# Altium PCB STM32F302VC_EVM.PcbDoc (part 7 of 19)
Units mil, origin at the board's own origin, x right, y up, seen from the top; angles counter-clockwise.
Board outline 3937.01 x 3937.01 mil, 2 copper layers (Top Layer, Bottom Layer); 117 components, 166 nets, 602 pads, 373 vias.
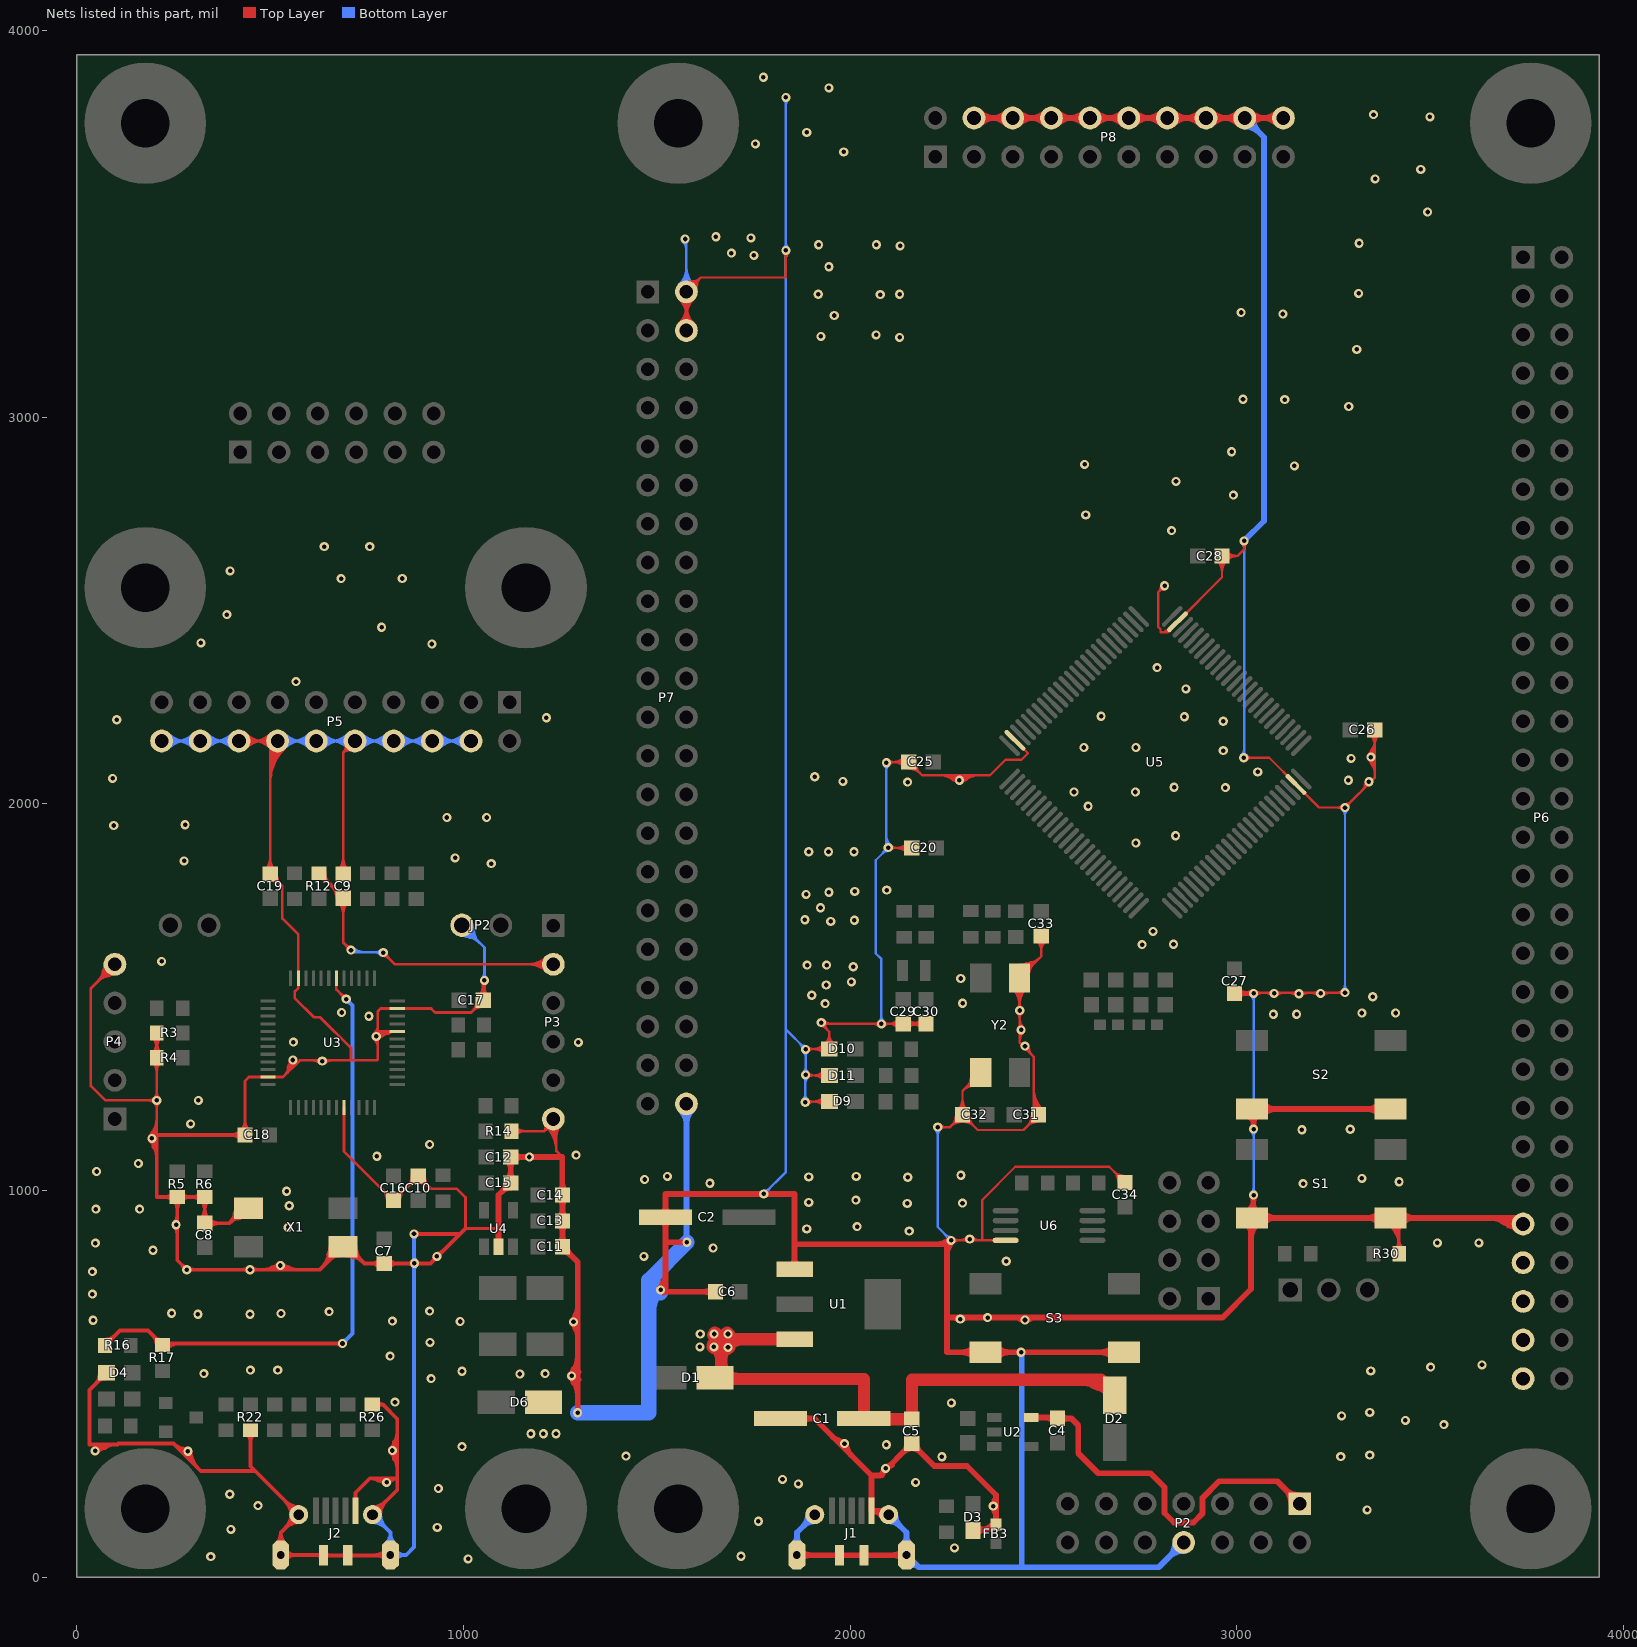
[diagram p7: the nets of this part, all layers, seen from the top]

## Via types
v1: diameter 23.62, hole 11.81, Top Layer to Bottom Layer, tented both sides, 372 vias
v2: diameter 50, hole 28, Top Layer to Bottom Layer, tented both sides, 1 vias

## Nets (pads, with @x,y where several pads share a name; then routed paths per layer and width w, separated by ;. In a path a pad name is that pad's centre, name@x,y a point inside that pad or via, vN(x,y) a via of type N, cw(c..) or ccw(c..) an arc to the next point about the centre after c; other vN are vias at no path point) (continued)
GND: (continued)
  Bottom Layer w6: P7.2@1576.38,3324.02 v1@1576.38,3460.63 ; v1(1776.57,991.14) 1833.66,1048.23 1833.66,1439.77 ; v1(1833.66,3826.77) v1(1833.66,3431.1) 1833.66,1439.77 ; v1(1883.86,1228.35) 1883.86,1298.15 v1(1884.84,1299.13) v1(1884.84,1365.16) 1833.66,1416.34 1833.66,1439.77 ; v1(2080.71,1431.1) 2080.71,1598.43 2065.94,1613.2 2065.94,1854.32 v1(2098.43,1886.81) ; v1@2093.5,1891.73 v1(2093.5,2106.3) ; v1(2226.38,1163.92) 2226.38,905.51 v1(2260.83,871.06) ; v1(3017.72,2119.09) 3018.7,2120.08 v1(3018.7,2680.12) ; v1(3043.31,988.19) v1(3043.31,1158.95) v1(3043.31,1509.84) ; v1(3279.53,1511.81) v1(3279.53,1990.28) ; P7.2@1557.62,3342.77 ccw(c1512.33,3388.06) 1576.38,3388.06 ; P7.2@1557.62,3342.77 ccw(c1512.33,3388.06) 1576.38,3388.06 ; P7.2@1557.62,3342.77 ccw(c1512.33,3388.06) 1576.38,3388.06 ; P7.2@1561.86,3338.53 ccw(c1526.82,3373.57) 1576.38,3373.57 ; P7.2@1561.86,3338.53 ccw(c1526.82,3373.57) 1576.38,3373.57 ; P7.2@1561.86,3338.53 ccw(c1526.82,3373.57) 1576.38,3373.57 ; P7.2@1566.11,3334.29 ccw(c1541.31,3359.09) 1576.38,3359.09 ; P7.2@1566.11,3334.29 ccw(c1541.31,3359.09) 1576.38,3359.09 ; P7.2@1566.11,3334.29 ccw(c1541.31,3359.09) 1576.38,3359.09 ; v1@1566.83,3454.4 cw(c1543.8,3431.36) 1576.38,3431.36 ; v1@1566.83,3454.4 cw(c1543.8,3431.36) 1576.38,3431.36 ; v1@1566.83,3454.4 cw(c1543.8,3431.36) 1576.38,3431.36 ; v1@1571.08,3458.64 cw(c1558.28,3445.85) 1576.38,3445.85 ; v1@1571.08,3458.64 cw(c1558.28,3445.85) 1576.38,3445.85 ; v1@1571.08,3458.64 cw(c1558.28,3445.85) 1576.38,3445.85 ; 1576.38,3359.09 ccw(c1611.45,3359.09) P7.2@1586.65,3334.29 ; 1576.38,3359.09 ccw(c1611.45,3359.09) P7.2@1586.65,3334.29 ; 1576.38,3359.09 ccw(c1611.45,3359.09) P7.2@1586.65,3334.29 ; 1576.38,3373.57 ccw(c1625.94,3373.57) P7.2@1590.89,3338.53 ; 1576.38,3373.57 ccw(c1625.94,3373.57) P7.2@1590.89,3338.53 ; 1576.38,3373.57 ccw(c1625.94,3373.57) P7.2@1590.89,3338.53 ; 1576.38,3388.06 ccw(c1640.42,3388.06) P7.2@1595.14,3342.77 ; 1576.38,3388.06 ccw(c1640.42,3388.06) P7.2@1595.14,3342.77 ; 1576.38,3388.06 ccw(c1640.42,3388.06) P7.2@1595.14,3342.77 ; 1576.38,3447.36 cw(c1586.34,3447.36) v1@1579.3,3454.4 ; 1576.38,3447.36 cw(c1586.34,3447.36) v1@1579.3,3454.4 ; 1576.38,3447.36 cw(c1586.34,3447.36) v1@1579.3,3454.4 ; v1@1776.57,999.95 ccw(c1776.57,1021.22) 1791.62,1006.18 ; v1@1776.57,999.95 ccw(c1776.57,1021.22) 1791.62,1006.18 ; v1@1776.57,999.95 ccw(c1776.57,1021.22) 1791.62,1006.18 ; v1@1785.39,991.14 cw(c1806.66,991.14) 1791.62,1006.18 ; v1@1785.39,991.14 cw(c1806.66,991.14) 1791.62,1006.18 ; v1@1785.39,991.14 cw(c1806.66,991.14) 1791.62,1006.18 ; v1@1827.43,3424.87 cw(c1812.39,3409.83) 1833.66,3409.83 ; v1@1827.43,3424.87 cw(c1812.39,3409.83) 1833.66,3409.83 ; v1@1827.43,3424.87 cw(c1812.39,3409.83) 1833.66,3409.83 ; v1@1827.43,3437.33 ccw(c1812.39,3452.37) 1833.66,3452.37 ; v1@1827.43,3437.33 ccw(c1812.39,3452.37) 1833.66,3452.37 ; v1@1827.43,3437.33 ccw(c1812.39,3452.37) 1833.66,3452.37 ; v1@1827.43,3820.54 cw(c1812.39,3805.5) 1833.66,3805.5 ; v1@1827.43,3820.54 cw(c1812.39,3805.5) 1833.66,3805.5 ; v1@1827.43,3820.54 cw(c1812.39,3805.5) 1833.66,3805.5 ; 1833.66,3409.83 cw(c1854.93,3409.83) v1@1839.89,3424.87 ; 1833.66,3409.83 cw(c1854.93,3409.83) v1@1839.89,3424.87 ; 1833.66,3409.83 cw(c1854.93,3409.83) v1@1839.89,3424.87 ; 1833.66,3452.37 ccw(c1854.93,3452.37) v1@1839.89,3437.33 ; 1833.66,3452.37 ccw(c1854.93,3452.37) v1@1839.89,3437.33 ; 1833.66,3452.37 ccw(c1854.93,3452.37) v1@1839.89,3437.33 ; 1833.66,3805.5 cw(c1854.93,3805.5) v1@1839.89,3820.54 ; 1833.66,3805.5 cw(c1854.93,3805.5) v1@1839.89,3820.54 ; 1833.66,3805.5 cw(c1854.93,3805.5) v1@1839.89,3820.54 ; 1869.8,1380.2 cw(c1854.76,1365.16) v1@1876.03,1365.16 ; 1869.8,1380.2 ccw(c1884.84,1395.24) v1@1884.84,1373.97 ; 1869.8,1380.2 ccw(c1884.84,1395.24) v1@1884.84,1373.97 ; 1869.8,1380.2 cw(c1854.76,1365.16) v1@1876.03,1365.16 ; 1869.8,1380.2 ccw(c1884.84,1395.24) v1@1884.84,1373.97 ; 1869.8,1380.2 cw(c1854.76,1365.16) v1@1876.03,1365.16 ; v1@1877.63,1234.58 ccw(c1862.59,1249.62) 1883.86,1249.62 ; v1@1877.63,1234.58 ccw(c1862.59,1249.62) 1883.86,1249.62 ; v1@1877.63,1234.58 ccw(c1862.59,1249.62) 1883.86,1249.62 ; v1@1878.61,1292.9 cw(c1865.95,1280.24) 1883.86,1280.24 ; v1@1878.61,1292.9 cw(c1865.95,1280.24) 1883.86,1280.24 ; v1@1878.61,1292.9 cw(c1865.95,1280.24) 1883.86,1280.24 ; v1@1878.61,1305.36 ccw(c1863.57,1320.41) 1884.84,1320.41 ; v1@1878.61,1305.36 ccw(c1863.57,1320.41) 1884.84,1320.41 ; v1@1878.61,1305.36 ccw(c1863.57,1320.41) 1884.84,1320.41 ; v1@1878.61,1358.93 cw(c1863.57,1343.89) 1884.84,1343.89 ; v1@1878.61,1358.93 cw(c1863.57,1343.89) 1884.84,1343.89 ; v1@1878.61,1358.93 cw(c1863.57,1343.89) 1884.84,1343.89 ; 1883.86,1249.62 ccw(c1905.13,1249.62) v1@1890.09,1234.58 ; 1883.86,1249.62 ccw(c1905.13,1249.62) v1@1890.09,1234.58 ; 1883.86,1249.62 ccw(c1905.13,1249.62) v1@1890.09,1234.58 ; 1883.86,1275.49 cw(c1908.49,1275.49) v1@1891.07,1292.9 ; 1883.86,1275.49 cw(c1908.49,1275.49) v1@1891.07,1292.9 ; 1883.86,1275.49 cw(c1908.49,1275.49) v1@1891.07,1292.9 ; 1884.84,1320.41 ccw(c1906.11,1320.41) v1@1891.07,1305.36 ; 1884.84,1320.41 ccw(c1906.11,1320.41) v1@1891.07,1305.36 ; 1884.84,1320.41 ccw(c1906.11,1320.41) v1@1891.07,1305.36 ; 1884.84,1343.89 cw(c1906.11,1343.89) v1@1891.07,1358.93 ; 1884.84,1343.89 cw(c1906.11,1343.89) v1@1891.07,1358.93 ; 1884.84,1343.89 cw(c1906.11,1343.89) v1@1891.07,1358.93 ; v1@2074.48,1437.33 ccw(c2059.44,1452.37) 2080.71,1452.37 ; v1@2074.48,1437.33 ccw(c2059.44,1452.37) 2080.71,1452.37 ; v1@2074.48,1437.33 ccw(c2059.44,1452.37) 2080.71,1452.37 ; 2080.71,1452.37 ccw(c2101.98,1452.37) v1@2086.94,1437.33 ; 2080.71,1452.37 ccw(c2101.98,1452.37) v1@2086.94,1437.33 ; 2080.71,1452.37 ccw(c2101.98,1452.37) v1@2086.94,1437.33 ; 2083.38,1871.77 cw(c2098.43,1856.73) v1@2098.43,1878 ; 2083.38,1871.77 ccw(c2068.34,1886.81) v1@2089.61,1886.81 ; 2083.38,1871.77 ccw(c2068.34,1886.81) v1@2089.61,1886.81 ; 2083.38,1871.77 cw(c2098.43,1856.73) v1@2098.43,1878 ; 2083.38,1871.77 ccw(c2068.34,1886.81) v1@2089.61,1886.81 ; 2083.38,1871.77 cw(c2098.43,1856.73) v1@2098.43,1878 ; v1@2087.27,2100.07 cw(c2072.23,2085.03) 2093.5,2085.03 ; v1@2087.27,2100.07 cw(c2072.23,2085.03) 2093.5,2085.03 ; v1@2087.27,2100.07 cw(c2072.23,2085.03) 2093.5,2085.03 ; 2093.5,1905.48 ccw(c2117.09,1905.48) v1@2100.41,1888.8 ; 2093.5,1905.48 ccw(c2117.09,1905.48) v1@2100.41,1888.8 ; 2093.5,1905.48 ccw(c2117.09,1905.48) v1@2100.41,1888.8 ; 2093.5,1919.96 ccw(c2131.58,1919.96) v1@2104.66,1893.04 ; 2093.5,1919.96 ccw(c2131.58,1919.96) v1@2104.66,1893.04 ; 2093.5,1919.96 ccw(c2131.58,1919.96) v1@2104.66,1893.04 ; 2093.5,2085.03 cw(c2114.78,2085.03) v1@2099.73,2100.07 ; 2093.5,2085.03 cw(c2114.78,2085.03) v1@2099.73,2100.07 ; 2093.5,2085.03 cw(c2114.78,2085.03) v1@2099.73,2100.07 ; v1@2220.15,1157.69 cw(c2205.11,1142.65) 2226.38,1142.65 ; v1@2220.15,1157.69 cw(c2205.11,1142.65) 2226.38,1142.65 ; v1@2220.15,1157.69 cw(c2205.11,1142.65) 2226.38,1142.65 ; 2226.38,1142.65 cw(c2247.65,1142.65) v1@2232.61,1157.69 ; 2226.38,1142.65 cw(c2247.65,1142.65) v1@2232.61,1157.69 ; 2226.38,1142.65 cw(c2247.65,1142.65) v1@2232.61,1157.69 ; 2245.79,886.1 cw(c2230.74,871.06) v1@2252.02,871.06 ; 2245.79,886.1 ccw(c2260.83,901.15) v1@2260.83,879.87 ; 2245.79,886.1 ccw(c2260.83,901.15) v1@2260.83,879.87 ; 2245.79,886.1 cw(c2230.74,871.06) v1@2252.02,871.06 ; 2245.79,886.1 ccw(c2260.83,901.15) v1@2260.83,879.87 ; 2245.79,886.1 cw(c2230.74,871.06) v1@2252.02,871.06 ; v1@3011.49,2125.32 ccw(c2994.07,2142.74) 3018.7,2142.74 ; v1@3011.49,2125.32 ccw(c2994.07,2142.74) 3018.7,2142.74 ; v1@3011.49,2125.32 ccw(c2994.07,2142.74) 3018.7,2142.74 ; v1@3012.47,2673.89 cw(c2997.43,2658.85) 3018.7,2658.85 ; v1@3012.47,2673.89 cw(c2997.43,2658.85) 3018.7,2658.85 ; v1@3012.47,2673.89 cw(c2997.43,2658.85) 3018.7,2658.85 ; 3018.7,2137.99 ccw(c3036.61,2137.99) v1@3023.95,2125.32 ; 3018.7,2137.99 ccw(c3036.61,2137.99) v1@3023.95,2125.32 ; 3018.7,2137.99 ccw(c3036.61,2137.99) v1@3023.95,2125.32 ; 3018.7,2658.85 cw(c3039.97,2658.85) v1@3024.93,2673.89 ; 3018.7,2658.85 cw(c3039.97,2658.85) v1@3024.93,2673.89 ; 3018.7,2658.85 cw(c3039.97,2658.85) v1@3024.93,2673.89 ; v1@3037.08,994.42 ccw(c3022.04,1009.46) 3043.31,1009.46 ; v1@3037.08,994.42 ccw(c3022.04,1009.46) 3043.31,1009.46 ; v1@3037.08,994.42 ccw(c3022.04,1009.46) 3043.31,1009.46 ; v1@3037.08,1152.72 cw(c3022.04,1137.68) 3043.31,1137.68 ; v1@3037.08,1152.72 cw(c3022.04,1137.68) 3043.31,1137.68 ; v1@3037.08,1152.72 cw(c3022.04,1137.68) 3043.31,1137.68 ; v1@3037.08,1165.18 ccw(c3022.04,1180.22) 3043.31,1180.22 ; v1@3037.08,1165.18 ccw(c3022.04,1180.22) 3043.31,1180.22 ; v1@3037.08,1165.18 ccw(c3022.04,1180.22) 3043.31,1180.22 ; v1@3037.08,1503.61 cw(c3022.04,1488.57) 3043.31,1488.57 ; v1@3037.08,1503.61 cw(c3022.04,1488.57) 3043.31,1488.57 ; v1@3037.08,1503.61 cw(c3022.04,1488.57) 3043.31,1488.57 ; 3043.31,1009.46 ccw(c3064.58,1009.46) v1@3049.54,994.42 ; 3043.31,1009.46 ccw(c3064.58,1009.46) v1@3049.54,994.42 ; 3043.31,1009.46 ccw(c3064.58,1009.46) v1@3049.54,994.42 ; 3043.31,1137.68 cw(c3064.58,1137.68) v1@3049.54,1152.72 ; 3043.31,1137.68 cw(c3064.58,1137.68) v1@3049.54,1152.72 ; 3043.31,1137.68 cw(c3064.58,1137.68) v1@3049.54,1152.72 ; 3043.31,1180.22 ccw(c3064.58,1180.22) v1@3049.54,1165.18 ; 3043.31,1180.22 ccw(c3064.58,1180.22) v1@3049.54,1165.18 ; 3043.31,1180.22 ccw(c3064.58,1180.22) v1@3049.54,1165.18 ; 3043.31,1488.57 cw(c3064.58,1488.57) v1@3049.54,1503.61 ; 3043.31,1488.57 cw(c3064.58,1488.57) v1@3049.54,1503.61 ; 3043.31,1488.57 cw(c3064.58,1488.57) v1@3049.54,1503.61 ; v1@3273.3,1518.04 ccw(c3258.26,1533.08) 3279.53,1533.08 ; v1@3273.3,1518.04 ccw(c3258.26,1533.08) 3279.53,1533.08 ; v1@3273.3,1518.04 ccw(c3258.26,1533.08) 3279.53,1533.08 ; v1@3273.3,1984.05 cw(c3258.26,1969.01) 3279.53,1969.01 ; v1@3273.3,1984.05 cw(c3258.26,1969.01) 3279.53,1969.01 ; v1@3273.3,1984.05 cw(c3258.26,1969.01) 3279.53,1969.01 ; 3279.53,1533.08 ccw(c3300.8,1533.08) v1@3285.76,1518.04 ; 3279.53,1533.08 ccw(c3300.8,1533.08) v1@3285.76,1518.04 ; 3279.53,1533.08 ccw(c3300.8,1533.08) v1@3285.76,1518.04 ; 3279.53,1969.01 cw(c3300.8,1969.01) v1@3285.76,1984.05 ; 3279.53,1969.01 cw(c3300.8,1969.01) v1@3285.76,1984.05 ; 3279.53,1969.01 cw(c3300.8,1969.01) v1@3285.76,1984.05
  Bottom Layer w7: P5.20@219.29,2162.6 P5.18@319.29,2162.6 P5.16@419.29,2162.6 ; P5.14@519.29,2162.6 P5.12@619.29,2162.6 P5.10@719.29,2162.6 P5.8@819.29,2162.6 P5.6@919.29,2162.6 P5.4@1019.29,2162.6 ; JP2.1@996.06,1686.02 1054.13,1627.94 v1(1054.13,1543.31) ; P5.20@232.75,2149.14 cw(c265.23,2116.66) 265.23,2162.6 ; P5.20@232.75,2149.14 cw(c265.23,2116.66) 265.23,2162.6 ; P5.20@232.75,2149.14 cw(c265.23,2116.66) 265.23,2162.6 ; P5.20@232.75,2176.05 ccw(c265.23,2208.53) 265.23,2162.6 ; P5.20@232.75,2176.05 ccw(c265.23,2208.53) 265.23,2162.6 ; P5.20@232.75,2176.05 ccw(c265.23,2208.53) 265.23,2162.6 ; P5.20@237.7,2144.19 cw(c282.13,2099.76) 282.13,2162.6 ; P5.20@237.7,2144.19 cw(c282.13,2099.76) 282.13,2162.6 ; P5.20@237.7,2144.19 cw(c282.13,2099.76) 282.13,2162.6 ; P5.20@237.7,2181 ccw(c282.13,2225.43) 282.13,2162.6 ; P5.20@237.7,2181 ccw(c282.13,2225.43) 282.13,2162.6 ; P5.20@237.7,2181 ccw(c282.13,2225.43) 282.13,2162.6 ; 256.46,2162.6 cw(c256.46,2099.76) P5.18@300.89,2144.19 ; 256.46,2162.6 ccw(c256.46,2225.43) P5.18@300.89,2181 ; 256.46,2162.6 ccw(c256.46,2225.43) P5.18@300.89,2181 ; 256.46,2162.6 cw(c256.46,2099.76) P5.18@300.89,2144.19 ; 256.46,2162.6 ccw(c256.46,2225.43) P5.18@300.89,2181 ; 256.46,2162.6 cw(c256.46,2099.76) P5.18@300.89,2144.19 ; 273.35,2162.6 cw(c273.35,2116.66) P5.18@305.84,2149.14 ; 273.35,2162.6 ccw(c273.35,2208.53) P5.18@305.84,2176.05 ; 273.35,2162.6 ccw(c273.35,2208.53) P5.18@305.84,2176.05 ; 273.35,2162.6 cw(c273.35,2116.66) P5.18@305.84,2149.14 ; 273.35,2162.6 ccw(c273.35,2208.53) P5.18@305.84,2176.05 ; 273.35,2162.6 cw(c273.35,2116.66) P5.18@305.84,2149.14 ; P5.18@332.75,2149.14 cw(c365.23,2116.66) 365.23,2162.6 ; P5.18@332.75,2149.14 cw(c365.23,2116.66) 365.23,2162.6 ; P5.18@332.75,2149.14 cw(c365.23,2116.66) 365.23,2162.6 ; P5.18@332.75,2176.05 ccw(c365.23,2208.53) 365.23,2162.6 ; P5.18@332.75,2176.05 ccw(c365.23,2208.53) 365.23,2162.6 ; P5.18@332.75,2176.05 ccw(c365.23,2208.53) 365.23,2162.6 ; P5.18@337.7,2144.19 cw(c382.13,2099.76) 382.13,2162.6 ; P5.18@337.7,2144.19 cw(c382.13,2099.76) 382.13,2162.6 ; P5.18@337.7,2144.19 cw(c382.13,2099.76) 382.13,2162.6 ; P5.18@337.7,2181 ccw(c382.13,2225.43) 382.13,2162.6 ; P5.18@337.7,2181 ccw(c382.13,2225.43) 382.13,2162.6 ; P5.18@337.7,2181 ccw(c382.13,2225.43) 382.13,2162.6 ; 356.46,2162.6 cw(c356.46,2099.76) P5.16@400.89,2144.19 ; 356.46,2162.6 ccw(c356.46,2225.43) P5.16@400.89,2181 ; 356.46,2162.6 ccw(c356.46,2225.43) P5.16@400.89,2181 ; 356.46,2162.6 cw(c356.46,2099.76) P5.16@400.89,2144.19 ; 356.46,2162.6 ccw(c356.46,2225.43) P5.16@400.89,2181 ; 356.46,2162.6 cw(c356.46,2099.76) P5.16@400.89,2144.19 ; 373.35,2162.6 cw(c373.35,2116.66) P5.16@405.84,2149.14 ; 373.35,2162.6 ccw(c373.35,2208.53) P5.16@405.84,2176.05 ; 373.35,2162.6 ccw(c373.35,2208.53) P5.16@405.84,2176.05 ; 373.35,2162.6 cw(c373.35,2116.66) P5.16@405.84,2149.14 ; 373.35,2162.6 ccw(c373.35,2208.53) P5.16@405.84,2176.05 ; 373.35,2162.6 cw(c373.35,2116.66) P5.16@405.84,2149.14 ; P5.14@532.75,2149.14 cw(c565.23,2116.66) 565.23,2162.6 ; P5.14@532.75,2149.14 cw(c565.23,2116.66) 565.23,2162.6 ; P5.14@532.75,2149.14 cw(c565.23,2116.66) 565.23,2162.6 ; P5.14@532.75,2176.05 ccw(c565.23,2208.53) 565.23,2162.6 ; P5.14@532.75,2176.05 ccw(c565.23,2208.53) 565.23,2162.6 ; P5.14@532.75,2176.05 ccw(c565.23,2208.53) 565.23,2162.6 ; P5.14@537.7,2144.19 cw(c582.13,2099.76) 582.13,2162.6 ; P5.14@537.7,2144.19 cw(c582.13,2099.76) 582.13,2162.6 ; P5.14@537.7,2144.19 cw(c582.13,2099.76) 582.13,2162.6 ; P5.14@537.7,2181 ccw(c582.13,2225.43) 582.13,2162.6 ; P5.14@537.7,2181 ccw(c582.13,2225.43) 582.13,2162.6 ; P5.14@537.7,2181 ccw(c582.13,2225.43) 582.13,2162.6 ; 556.46,2162.6 cw(c556.46,2099.76) P5.12@600.89,2144.19 ; 556.46,2162.6 ccw(c556.46,2225.43) P5.12@600.89,2181 ; 556.46,2162.6 ccw(c556.46,2225.43) P5.12@600.89,2181 ; 556.46,2162.6 cw(c556.46,2099.76) P5.12@600.89,2144.19 ; 556.46,2162.6 ccw(c556.46,2225.43) P5.12@600.89,2181 ; 556.46,2162.6 cw(c556.46,2099.76) P5.12@600.89,2144.19 ; 573.35,2162.6 cw(c573.35,2116.66) P5.12@605.84,2149.14 ; 573.35,2162.6 ccw(c573.35,2208.53) P5.12@605.84,2176.05 ; 573.35,2162.6 ccw(c573.35,2208.53) P5.12@605.84,2176.05 ; 573.35,2162.6 cw(c573.35,2116.66) P5.12@605.84,2149.14 ; 573.35,2162.6 ccw(c573.35,2208.53) P5.12@605.84,2176.05 ; 573.35,2162.6 cw(c573.35,2116.66) P5.12@605.84,2149.14 ; P5.12@632.75,2149.14 cw(c665.23,2116.66) 665.23,2162.6 ; P5.12@632.75,2149.14 cw(c665.23,2116.66) 665.23,2162.6 ; P5.12@632.75,2149.14 cw(c665.23,2116.66) 665.23,2162.6 ; P5.12@632.75,2176.05 ccw(c665.23,2208.53) 665.23,2162.6 ; P5.12@632.75,2176.05 ccw(c665.23,2208.53) 665.23,2162.6 ; P5.12@632.75,2176.05 ccw(c665.23,2208.53) 665.23,2162.6 ; P5.12@637.7,2144.19 cw(c682.13,2099.76) 682.13,2162.6 ; P5.12@637.7,2144.19 cw(c682.13,2099.76) 682.13,2162.6 ; P5.12@637.7,2144.19 cw(c682.13,2099.76) 682.13,2162.6 ; P5.12@637.7,2181 ccw(c682.13,2225.43) 682.13,2162.6 ; P5.12@637.7,2181 ccw(c682.13,2225.43) 682.13,2162.6 ; P5.12@637.7,2181 ccw(c682.13,2225.43) 682.13,2162.6 ; 656.46,2162.6 cw(c656.46,2099.76) P5.10@700.89,2144.19 ; 656.46,2162.6 ccw(c656.46,2225.43) P5.10@700.89,2181 ; 656.46,2162.6 ccw(c656.46,2225.43) P5.10@700.89,2181 ; 656.46,2162.6 cw(c656.46,2099.76) P5.10@700.89,2144.19 ; 656.46,2162.6 ccw(c656.46,2225.43) P5.10@700.89,2181 ; 656.46,2162.6 cw(c656.46,2099.76) P5.10@700.89,2144.19 ; 673.35,2162.6 cw(c673.35,2116.66) P5.10@705.84,2149.14 ; 673.35,2162.6 ccw(c673.35,2208.53) P5.10@705.84,2176.05 ; 673.35,2162.6 ccw(c673.35,2208.53) P5.10@705.84,2176.05 ; 673.35,2162.6 cw(c673.35,2116.66) P5.10@705.84,2149.14 ; 673.35,2162.6 ccw(c673.35,2208.53) P5.10@705.84,2176.05 ; 673.35,2162.6 cw(c673.35,2116.66) P5.10@705.84,2149.14 ; P5.10@732.75,2149.14 cw(c765.23,2116.66) 765.23,2162.6 ; P5.10@732.75,2149.14 cw(c765.23,2116.66) 765.23,2162.6 ; P5.10@732.75,2149.14 cw(c765.23,2116.66) 765.23,2162.6 ; P5.10@732.75,2176.05 ccw(c765.23,2208.53) 765.23,2162.6 ; P5.10@732.75,2176.05 ccw(c765.23,2208.53) 765.23,2162.6 ; P5.10@732.75,2176.05 ccw(c765.23,2208.53) 765.23,2162.6 ; P5.10@737.7,2144.19 cw(c782.13,2099.76) 782.13,2162.6 ; P5.10@737.7,2144.19 cw(c782.13,2099.76) 782.13,2162.6 ; P5.10@737.7,2144.19 cw(c782.13,2099.76) 782.13,2162.6 ; P5.10@737.7,2181 ccw(c782.13,2225.43) 782.13,2162.6 ; P5.10@737.7,2181 ccw(c782.13,2225.43) 782.13,2162.6 ; P5.10@737.7,2181 ccw(c782.13,2225.43) 782.13,2162.6 ; 756.46,2162.6 cw(c756.46,2099.76) P5.8@800.89,2144.19 ; 756.46,2162.6 ccw(c756.46,2225.43) P5.8@800.89,2181 ; 756.46,2162.6 ccw(c756.46,2225.43) P5.8@800.89,2181 ; 756.46,2162.6 cw(c756.46,2099.76) P5.8@800.89,2144.19 ; 756.46,2162.6 ccw(c756.46,2225.43) P5.8@800.89,2181 ; 756.46,2162.6 cw(c756.46,2099.76) P5.8@800.89,2144.19 ; 773.35,2162.6 cw(c773.35,2116.66) P5.8@805.84,2149.14 ; 773.35,2162.6 ccw(c773.35,2208.53) P5.8@805.84,2176.05 ; 773.35,2162.6 ccw(c773.35,2208.53) P5.8@805.84,2176.05 ; 773.35,2162.6 cw(c773.35,2116.66) P5.8@805.84,2149.14 ; 773.35,2162.6 ccw(c773.35,2208.53) P5.8@805.84,2176.05 ; 773.35,2162.6 cw(c773.35,2116.66) P5.8@805.84,2149.14 ; P5.8@832.75,2149.14 cw(c865.23,2116.66) 865.23,2162.6 ; P5.8@832.75,2149.14 cw(c865.23,2116.66) 865.23,2162.6 ; P5.8@832.75,2149.14 cw(c865.23,2116.66) 865.23,2162.6 ; P5.8@832.75,2176.05 ccw(c865.23,2208.53) 865.23,2162.6 ; P5.8@832.75,2176.05 ccw(c865.23,2208.53) 865.23,2162.6 ; P5.8@832.75,2176.05 ccw(c865.23,2208.53) 865.23,2162.6 ; P5.8@837.7,2144.19 cw(c882.13,2099.76) 882.13,2162.6 ; P5.8@837.7,2144.19 cw(c882.13,2099.76) 882.13,2162.6 ; P5.8@837.7,2144.19 cw(c882.13,2099.76) 882.13,2162.6 ; P5.8@837.7,2181 ccw(c882.13,2225.43) 882.13,2162.6 ; P5.8@837.7,2181 ccw(c882.13,2225.43) 882.13,2162.6 ; P5.8@837.7,2181 ccw(c882.13,2225.43) 882.13,2162.6 ; 856.46,2162.6 cw(c856.46,2099.76) P5.6@900.89,2144.19 ; 856.46,2162.6 ccw(c856.46,2225.43) P5.6@900.89,2181 ; 856.46,2162.6 ccw(c856.46,2225.43) P5.6@900.89,2181 ; 856.46,2162.6 cw(c856.46,2099.76) P5.6@900.89,2144.19 ; 856.46,2162.6 ccw(c856.46,2225.43) P5.6@900.89,2181 ; 856.46,2162.6 cw(c856.46,2099.76) P5.6@900.89,2144.19 ; 873.35,2162.6 cw(c873.35,2116.66) P5.6@905.84,2149.14 ; 873.35,2162.6 ccw(c873.35,2208.53) P5.6@905.84,2176.05 ; 873.35,2162.6 ccw(c873.35,2208.53) P5.6@905.84,2176.05 ; 873.35,2162.6 cw(c873.35,2116.66) P5.6@905.84,2149.14 ; 873.35,2162.6 ccw(c873.35,2208.53) P5.6@905.84,2176.05 ; 873.35,2162.6 cw(c873.35,2116.66) P5.6@905.84,2149.14 ; P5.6@932.75,2149.14 cw(c965.23,2116.66) 965.23,2162.6 ; P5.6@932.75,2149.14 cw(c965.23,2116.66) 965.23,2162.6 ; P5.6@932.75,2149.14 cw(c965.23,2116.66) 965.23,2162.6 ; P5.6@932.75,2176.05 ccw(c965.23,2208.53) 965.23,2162.6 ; P5.6@932.75,2176.05 ccw(c965.23,2208.53) 965.23,2162.6 ; P5.6@932.75,2176.05 ccw(c965.23,2208.53) 965.23,2162.6 ; P5.6@937.7,2144.19 cw(c982.13,2099.76) 982.13,2162.6 ; P5.6@937.7,2144.19 cw(c982.13,2099.76) 982.13,2162.6 ; P5.6@937.7,2144.19 cw(c982.13,2099.76) 982.13,2162.6 ; P5.6@937.7,2181 ccw(c982.13,2225.43) 982.13,2162.6 ; P5.6@937.7,2181 ccw(c982.13,2225.43) 982.13,2162.6 ; P5.6@937.7,2181 ccw(c982.13,2225.43) 982.13,2162.6 ; 956.46,2162.6 cw(c956.46,2099.76) P5.4@1000.89,2144.19 ; 956.46,2162.6 ccw(c956.46,2225.43) P5.4@1000.89,2181 ; 956.46,2162.6 ccw(c956.46,2225.43) P5.4@1000.89,2181 ; 956.46,2162.6 cw(c956.46,2099.76) P5.4@1000.89,2144.19 ; 956.46,2162.6 ccw(c956.46,2225.43) P5.4@1000.89,2181 ; 956.46,2162.6 cw(c956.46,2099.76) P5.4@1000.89,2144.19 ; 973.35,2162.6 cw(c973.35,2116.66) P5.4@1005.84,2149.14 ; 973.35,2162.6 ccw(c973.35,2208.53) P5.4@1005.84,2176.05 ; 973.35,2162.6 ccw(c973.35,2208.53) P5.4@1005.84,2176.05 ; 973.35,2162.6 cw(c973.35,2116.66) P5.4@1005.84,2149.14 ; 973.35,2162.6 ccw(c973.35,2208.53) P5.4@1005.84,2176.05 ; 973.35,2162.6 cw(c973.35,2116.66) P5.4@1005.84,2149.14 ; JP2.1@980.88,1682.91 ccw(c1013.96,1689.68) 1005.22,1657.06 ; JP2.1@980.88,1682.91 ccw(c1013.96,1689.68) 1005.22,1657.06 ; JP2.1@980.88,1682.91 ccw(c1013.96,1689.68) 1005.22,1657.06 ; JP2.1@987.74,1684.31 ccw(c1026.37,1692.22) 1016.16,1654.13 ; JP2.1@987.74,1684.31 ccw(c1026.37,1692.22) 1016.16,1654.13 ; JP2.1@987.74,1684.31 ccw(c1026.37,1692.22) 1016.16,1654.13 ; JP2.1@994.59,1685.71 ccw(c1038.78,1694.76) 1027.11,1651.2 ; JP2.1@994.59,1685.71 ccw(c1038.78,1694.76) 1027.11,1651.2 ; JP2.1@994.59,1685.71 ccw(c1038.78,1694.76) 1027.11,1651.2 ; JP2.1@996.06,1659.52 cw(c996.06,1595.54) 1041.3,1640.78 ; JP2.1@996.06,1659.52 cw(c996.06,1595.54) 1041.3,1640.78 ; JP2.1@996.06,1659.52 cw(c996.06,1595.54) 1041.3,1640.78 ; JP2.1@996.06,1666.52 cw(c996.06,1619.44) 1029.35,1652.73 ; JP2.1@996.06,1666.52 cw(c996.06,1619.44) 1029.35,1652.73 ; JP2.1@996.06,1666.52 cw(c996.06,1619.44) 1029.35,1652.73 ; JP2.1@996.06,1673.52 cw(c996.06,1643.34) 1017.4,1664.68 ; JP2.1@996.06,1673.52 cw(c996.06,1643.34) 1017.4,1664.68 ; JP2.1@996.06,1673.52 cw(c996.06,1643.34) 1017.4,1664.68 ; JP2.1@996.36,1687.48 cw(c987.32,1643.3) 1030.88,1654.97 ; JP2.1@996.36,1687.48 cw(c987.32,1643.3) 1030.88,1654.97 ; JP2.1@996.36,1687.48 cw(c987.32,1643.3) 1030.88,1654.97 ; JP2.1@997.77,1694.34 cw(c989.86,1655.71) 1027.95,1665.92 ; JP2.1@997.77,1694.34 cw(c989.86,1655.71) 1027.95,1665.92 ; JP2.1@997.77,1694.34 cw(c989.86,1655.71) 1027.95,1665.92 ; JP2.1@999.17,1701.2 cw(c992.4,1668.12) 1025.02,1676.86 ; JP2.1@999.17,1701.2 cw(c992.4,1668.12) 1025.02,1676.86 ; JP2.1@999.17,1701.2 cw(c992.4,1668.12) 1025.02,1676.86 ; JP2.1@1008.56,1686.02 ccw(c1038.74,1686.02) 1017.4,1664.68 ; JP2.1@1008.56,1686.02 ccw(c1038.74,1686.02) 1017.4,1664.68 ; JP2.1@1008.56,1686.02 ccw(c1038.74,1686.02) 1017.4,1664.68 ; JP2.1@1015.56,1686.02 ccw(c1062.64,1686.02) 1029.35,1652.73 ; JP2.1@1015.56,1686.02 ccw(c1062.64,1686.02) 1029.35,1652.73 ; JP2.1@1015.56,1686.02 ccw(c1062.64,1686.02) 1029.35,1652.73 ; JP2.1@1022.56,1686.02 ccw(c1086.54,1686.02) 1041.3,1640.78 ; JP2.1@1022.56,1686.02 ccw(c1086.54,1686.02) 1041.3,1640.78 ; JP2.1@1022.56,1686.02 ccw(c1086.54,1686.02) 1041.3,1640.78 ; v1@1048.26,1549.18 ccw(c1034.07,1563.37) 1054.13,1563.37 ; v1@1048.26,1549.18 ccw(c1034.07,1563.37) 1054.13,1563.37 ; v1@1048.26,1549.18 ccw(c1034.07,1563.37) 1054.13,1563.37 ; 1054.13,1563.37 ccw(c1074.2,1563.37) v1@1060.01,1549.18 ; 1054.13,1563.37 ccw(c1074.2,1563.37) v1@1060.01,1549.18 ; 1054.13,1563.37 ccw(c1074.2,1563.37) v1@1060.01,1549.18
  Bottom Layer w10: J2.8@764.76,161.91 811.02,115.65 J2.6@811.02,57.58 851.87,57.58 872.05,77.76 v1(872.05,887.8) ; J2.8@764.38,161.83 ccw(c797.64,168.64) 788.85,135.85 ; J2.8@764.38,161.83 ccw(c797.64,168.64) 788.85,135.85 ; J2.8@764.38,161.83 ccw(c797.64,168.64) 788.85,135.85 ; J2.8@764.76,142.3 cw(c764.76,94.97) 798.23,128.44 ; J2.8@764.76,142.3 cw(c764.76,94.97) 798.23,128.44 ; J2.8@764.76,142.3 cw(c764.76,94.97) 798.23,128.44 ; J2.8@764.84,162.3 cw(c758.03,129.04) 790.82,137.82 ; J2.8@764.84,162.3 cw(c758.03,129.04) 790.82,137.82 ; J2.8@764.84,162.3 cw(c758.03,129.04) 790.82,137.82 ; J2.8@784.37,161.91 ccw(c831.7,161.91) 798.23,128.44 ; J2.8@784.37,161.91 ccw(c831.7,161.91) 798.23,128.44 ; J2.8@784.37,161.91 ccw(c831.7,161.91) 798.23,128.44 ; J2.6@799.25,85.1 ccw(c770.82,113.53) 811.02,113.53 ; J2.6@799.25,85.1 ccw(c770.82,113.53) 811.02,113.53 ; J2.6@799.25,85.1 ccw(c770.82,113.53) 811.02,113.53 ; 811.02,113.53 ccw(c851.23,113.53) J2.6@822.8,85.1 ; 811.02,113.53 ccw(c851.23,113.53) J2.6@822.8,85.1 ; 811.02,113.53 ccw(c851.23,113.53) J2.6@822.8,85.1 ; J2.6@822.8,45.8 cw(c851.23,17.37) 851.23,57.58 ; J2.6@822.8,45.8 cw(c851.23,17.37) 851.23,57.58 ; J2.6@822.8,45.8 cw(c851.23,17.37) 851.23,57.58 ; J2.6@822.8,69.35 ccw(c851.23,97.78) 851.23,57.58 ; J2.6@822.8,69.35 ccw(c851.23,97.78) 851.23,57.58 ; J2.6@822.8,69.35 ccw(c851.23,97.78) 851.23,57.58 ; v1@867.23,882.98 cw(c855.6,871.35) 872.05,871.35 ; v1@867.23,882.98 cw(c855.6,871.35) 872.05,871.35 ; v1@867.23,882.98 cw(c855.6,871.35) 872.05,871.35 ; v1@868.22,807.19 cw(c858.96,797.94) 872.05,797.94 ; v1@868.22,807.19 cw(c858.96,797.94) 872.05,797.94 ; v1@868.22,807.19 cw(c858.96,797.94) 872.05,797.94 ; v1@868.22,816.82 ccw(c858.96,826.07) 872.05,826.07 ; v1@868.22,816.82 ccw(c858.96,826.07) 872.05,826.07 ; v1@868.22,816.82 ccw(c858.96,826.07) 872.05,826.07 ; 872.05,793.19 cw(c891.85,793.19) v1@877.85,807.19 ; 872.05,793.19 cw(c891.85,793.19) v1@877.85,807.19 ; 872.05,793.19 cw(c891.85,793.19) v1@877.85,807.19 ; 872.05,830.83 ccw(c891.85,830.83) v1@877.85,816.82 ; 872.05,830.83 ccw(c891.85,830.83) v1@877.85,816.82 ; 872.05,830.83 ccw(c891.85,830.83) v1@877.85,816.82 ; 872.05,871.35 cw(c888.49,871.35) v1@876.86,882.98 ; 872.05,871.35 cw(c888.49,871.35) v1@876.86,882.98 ; 872.05,871.35 cw(c888.49,871.35) v1@876.86,882.98
  Bottom Layer w15: P7.44@1576.38,1224.02 1576.38,867.65 v1(1577.76,866.27) ; J1.7@1862.2,57.58 1862.2,115.65 J1.9@1908.46,161.91 ; J1.8@2099.41,161.91 2145.67,115.65 J1.6@2145.67,57.58 2177.5,25.75 ; v1(2441.93,581.69) 2443.9,579.72 2443.9,25.75 ; P2.8@2862.4,89.96 2798.19,25.75 2443.9,25.75 ; v1(3018.7,2680.12) 3069.88,2731.3 3069.88,3723.82 P8.18@3020.28,3773.43 ; P7.44@1560.8,1208.44 cw(c1523.2,1170.84) 1576.38,1170.84 ; P7.44@1560.8,1208.44 cw(c1523.2,1170.84) 1576.38,1170.84 ; P7.44@1560.8,1208.44 cw(c1523.2,1170.84) 1576.38,1170.84 ; 1576.38,880 ccw(c1591.49,880) v1@1580.8,869.32 ; 1576.38,880 ccw(c1591.49,880) v1@1580.8,869.32 ; 1576.38,880 ccw(c1591.49,880) v1@1580.8,869.32 ; 1576.38,1170.84 cw(c1629.56,1170.84) P7.44@1591.95,1208.44 ; 1576.38,1170.84 cw(c1629.56,1170.84) P7.44@1591.95,1208.44 ; 1576.38,1170.84 cw(c1629.56,1170.84) P7.44@1591.95,1208.44 ; J1.7@1852.2,83.33 ccw(c1828.03,107.5) 1862.2,107.5 ; J1.7@1852.2,83.33 ccw(c1828.03,107.5) 1862.2,107.5 ; J1.7@1852.2,83.33 ccw(c1828.03,107.5) 1862.2,107.5 ; 1862.2,107.5 ccw(c1896.37,107.5) J1.7@1872.21,83.33 ; 1862.2,107.5 ccw(c1896.37,107.5) J1.7@1872.21,83.33 ; 1862.2,107.5 ccw(c1896.37,107.5) J1.7@1872.21,83.33 ; 1879.26,132.71 cw(c1908.46,103.5) J1.9@1908.46,144.8 ; 1879.26,132.71 ccw(c1850.06,161.91) J1.9@1891.36,161.91 ; 1879.26,132.71 ccw(c1850.06,161.91) J1.9@1891.36,161.91 ; 1879.26,132.71 cw(c1908.46,103.5) J1.9@1908.46,144.8 ; 1879.26,132.71 ccw(c1850.06,161.91) J1.9@1891.36,161.91 ; 1879.26,132.71 cw(c1908.46,103.5) J1.9@1908.46,144.8 ; J1.8@2099.41,144.8 cw(c2099.41,103.5) 2128.61,132.71 ; J1.8@2099.41,144.8 cw(c2099.41,103.5) 2128.61,132.71 ; J1.8@2099.41,144.8 cw(c2099.41,103.5) 2128.61,132.71 ; J1.8@2116.52,161.91 ccw(c2157.81,161.91) 2128.61,132.71 ; J1.8@2116.52,161.91 ccw(c2157.81,161.91) 2128.61,132.71 ; J1.8@2116.52,161.91 ccw(c2157.81,161.91) 2128.61,132.71 ; J1.6@2135.66,83.33 ccw(c2111.5,107.5) 2145.67,107.5 ; J1.6@2135.66,83.33 ccw(c2111.5,107.5) 2145.67,107.5 ; J1.6@2135.66,83.33 ccw(c2111.5,107.5) 2145.67,107.5 ; 2145.67,107.5 ccw(c2179.84,107.5) J1.6@2155.68,83.33 ; 2145.67,107.5 ccw(c2179.84,107.5) J1.6@2155.68,83.33 ; 2145.67,107.5 ccw(c2179.84,107.5) J1.6@2155.68,83.33 ; J1.6@2152.42,29.39 cw(c2162.52,10.77) 2177.5,25.75 ; J1.6@2152.42,29.39 cw(c2162.52,10.77) 2177.5,25.75 ; J1.6@2152.42,29.39 cw(c2162.52,10.77) 2177.5,25.75 ; 2177.5,25.75 2443.9,25.75 ; v1@2438.88,578.64 cw(c2426.77,566.53) 2443.9,566.53 ; v1@2438.88,578.64 cw(c2426.77,566.53) 2443.9,566.53 ; v1@2438.88,578.64 cw(c2426.77,566.53) 2443.9,566.53 ; 2824.8,52.36 cw(c2862.4,14.75) P2.8@2862.4,67.93 ; 2824.8,52.36 ccw(c2787.2,89.96) P2.8@2840.37,89.96 ; 2824.8,52.36 ccw(c2787.2,89.96) P2.8@2840.37,89.96 ; 2824.8,52.36 cw(c2862.4,14.75) P2.8@2862.4,67.93 ; 2824.8,52.36 ccw(c2787.2,89.96) P2.8@2840.37,89.96 ; 2824.8,52.36 cw(c2862.4,14.75) P2.8@2862.4,67.93 ; P8.18@3020.28,3751.4 cw(c3020.28,3698.22) 3057.88,3735.82 ; P8.18@3020.28,3751.4 cw(c3020.28,3698.22) 3057.88,3735.82 ; P8.18@3020.28,3751.4 cw(c3020.28,3698.22) 3057.88,3735.82 ; P8.18@3042.3,3773.43 ccw(c3095.48,3773.43) 3057.88,3735.82 ; P8.18@3042.3,3773.43 ccw(c3095.48,3773.43) 3057.88,3735.82 ; P8.18@3042.3,3773.43 ccw(c3095.48,3773.43) 3057.88,3735.82
  Bottom Layer w39.37: v1(1295.28,425.2) 1479.33,425.2 1479.33,767.84 ; v1(1577.76,866.27) 1479.33,767.84 ; 1479.33,688.46 cw(c1564.49,688.46) v1@1504.27,748.68 ; 1479.33,688.46 cw(c1564.49,688.46) v1@1504.27,748.68 ; 1479.33,688.46 cw(c1564.49,688.46) v1@1504.27,748.68 ; 1479.33,767.84 ccw(c1512.03,767.84) v1@1509.15,735.27 ; 1479.33,767.84 ccw(c1512.03,767.84) v1@1509.15,735.27 ; 1479.33,767.84 ccw(c1512.03,767.84) v1@1509.15,735.27
  other v1: 1011.81,47.19 346.46,53.15 1717.55,54.13 2269.68,75.79 398.61,123.58 932.09,128.94 1762.8,144.68 3336.61,174.21 2370.08,184.06 468.5,185.29 395.67,214.57 935.04,229.33 1866.14,241.14 801.18,245.08 2169.29,245.08 1824.89,252.95 2091.54,281.5 2237.2,311.47 3268.7,312.01 1420.28,312.99 3343.5,315.94 287.4,325.79 47.19,326.77 815.94,327.76 996.06,337.6 2093.5,342.39 1985.24,345.57 3535.43,394.68 3435.92,405.51 3270.67,417.09 3343.5,426.18 2261.81,450.79 822.83,452.76 916.34,513.78 1279.53,520.67 1145.67,525.59 328.53,526.57 1211.07,526.57 996.06,532.48 3346.3,533.46 448.9,535.43 519.68,535.43 3500.98,543.31 3633.86,549.21 810.04,571.85 913.39,607.26 1284.45,660.43 991.14,661.37 816.02,662.4 42.32,664.37 2452.02,665.13 2284.45,667.32 2355.32,671.26 312.99,680.12 447.83,680.12 245.08,682.48 528.09,681.89 652.56,687.01 912.4,687.99 40.35,732.28 1509.84,743.11 40.35,790.35 447.83,795.28 526.57,806.1 873.03,812.01 2403.54,816.93 931.1,829.72 1466.54,829.72 197.07,845.47 1645.67,851.38 47.96,864.17 3518.7,864.57 3625.98,864.57 2309.06,874.18 2152.56,895.13 1887.8,900.59 546.26,904.53 2017.72,906.5 256.89,911.42 49.21,951.77 162.4,951.77 549.51,960.63 2147.64,966.8 2290.35,967.52 1892.99,969.49 2014.76,975.39 542.68,998.03 3171.26,1017.72 1637.03,1018.7 3419.45,1022.66 1468.5,1028.54 3323.15,1031.38 2148.94,1034.45 1892.72,1035.43 1527.43,1036.42 2015.75,1036.42 2286.42,1039.37 51.18,1049.21 159.2,1069.88 1170.28,1086.61 776.08,1088.58 1291.34,1091.61 912.4,1119.09 194.01,1134.84 3168.31,1157.06 3293.31,1158.46 294.23,1172.24 314.29,1233.27 634.84,1334.65 558.9,1337.6 2452.02,1373.61 1297.24,1383.06 560,1383.86 774.43,1398.68 2441.93,1415.35 1925.2,1434.06 755.41,1450.79 3094.49,1455.71 3154.53,1455.71 3323.15,1459.15 3410.43,1459.15 684.76,1460.31 2438.38,1465.55 1935.04,1483.27 2290.87,1484.29 3351.5,1500.98 1900.59,1504.92 3160.43,1508.86 3096.46,1509.84 3216.54,1509.84 1937.99,1531.5 2002.95,1539.37 2286.01,1548.23 2007.87,1578.74 1888.78,1583 1938.85,1583 219.29,1592.52 2754.83,1635.83 2836.11,1636.81 2783.11,1670.28 1949.8,1695.87 2010.92,1699.09 1882.87,1700.09 1923.23,1731.3 1885.83,1765.75 1944.88,1771.23 2011.81,1773.62 2094.49,1777 1071.85,1845.47 277.56,1852.36 978.27,1860.24 1892.72,1875.98 1943.9,1875.98 2009.94,1875.98 2738.97,1898.72 2841.54,1917.32 95.47,1943.9 280.08,1945.87 957.09,1964.57 1059.75,1964.57 2615.16,1993.73 2578.74,2030.51 2737.57,2030.51 2970.47,2041.9 2837.63,2042.9 2148.62,2056.1 3341.54,2057.09 1981.3,2058.07 2282.48,2061.02 3288.39,2061.02 92.52,2065.94 1908.46,2069.88 3054.13,2082.58 3295.28,2117.54 3346.46,2120.97 2964.75,2137.8 2604.33,2145.67 2738.97,2145.67 2964.75,2213.58 103.35,2217.52 1214.37,2222.44 2864.17,2225.25 2648.78,2226.38 2868.11,2297.24 566.88,2315.94 2793.63,2352.36 918.3,2413.39 320.87,2416.34 788.39,2456.66 388.22,2489.17 683.46,2582.3 841.54,2582.68 396.43,2602.36 639.76,2665.35 757.45,2665.35 2831.14,2706.69 2609.25,2747.05 2991.14,2798.23 2842.52,2833.66 3148.62,2874.02 2606.3,2877.95 2986.22,2910.43 3289.37,3027.56 3123.63,3045.28 3015.75,3046.26 3310.04,3175.2 2127.95,3206.1 1924.21,3208.66 2066.93,3212.6 1958.66,3262.8 3119.09,3266.73 3010.83,3270.67 2077.76,3316.93 1917.32,3317.91 2127.95,3317.91 3314.96,3319.88 1944.88,3388.78 1750.98,3418.31 1692.87,3424.02 2128.94,3442.91 1918.31,3445.87 2067.91,3445.87 3315.94,3449.8 1573.07,3460.63 1743.11,3463.58 1652.56,3466.54 3493.11,3530.51 3357.28,3616.14 3475.39,3640.75 1983.27,3686.02 1754.92,3706.69 1887.8,3736.22 3499.02,3776.57 3353.35,3782.48 1944.88,3851.38 1775.59,3878.94
LED_STLINK: R16.2 R17.2 U3.30 | length 2432.7
  Top Layer w7: U3.30@671.26,1549.21 671.26,1519.68 695.87,1495.08 v1(696.85,1495.08) ; 680.98,1509.96 ccw(c696.85,1525.83) v1@696.85,1503.39 ; 680.98,1509.96 ccw(c696.85,1525.83) v1@696.85,1503.39 ; 680.98,1509.96 ccw(c696.85,1525.83) v1@696.85,1503.39 ; 683.36,1507.59 cw(c670.85,1495.08) v1@688.54,1495.08 ; 683.36,1507.59 cw(c670.85,1495.08) v1@688.54,1495.08 ; 683.36,1507.59 cw(c670.85,1495.08) v1@688.54,1495.08 ; 685.37,1506.92 ccw(c699.35,1510.67) v1@697.06,1496.37 ; 685.37,1506.92 ccw(c699.35,1510.67) v1@697.06,1496.37 ; 685.37,1506.92 ccw(c699.35,1510.67) v1@697.06,1496.37
  Top Layer w10: R16.2@72.83,599.41 111.22,637.8 184.06,637.8 R17.2@221.46,600.39 225.39,604.33 v1(687.01,604.33) ; R16.2@72.83,614.09 ccw(c72.83,649.55) 97.9,624.48 ; R16.2@72.83,614.09 ccw(c72.83,649.55) 97.9,624.48 ; R16.2@72.83,614.09 ccw(c72.83,649.55) 97.9,624.48 ; R16.2@85.55,601.38 cw(c111.5,601.38) 93.15,619.73 ; R16.2@85.55,601.38 cw(c111.5,601.38) 93.15,619.73 ; R16.2@85.55,601.38 cw(c111.5,601.38) 93.15,619.73 ; 196.39,625.46 cw(c171.32,600.39) R17.2@206.77,600.39 ; 196.39,625.46 cw(c171.32,600.39) R17.2@206.77,600.39 ; 196.39,625.46 cw(c171.32,600.39) R17.2@206.77,600.39 ; 201.14,620.71 ccw(c219.49,639.06) R17.2@219.49,613.11 ; 201.14,620.71 ccw(c219.49,639.06) R17.2@219.49,613.11 ; 201.14,620.71 ccw(c219.49,639.06) R17.2@219.49,613.11 ; R17.2@232.42,591.4 cw(c263.63,560.19) 263.63,604.33 ; R17.2@232.42,591.4 cw(c263.63,560.19) 263.63,604.33 ; R17.2@232.42,591.4 cw(c263.63,560.19) 263.63,604.33 ; R17.2@232.42,609.39 ccw(c244.62,621.59) 244.62,604.33 ; R17.2@232.42,609.39 ccw(c244.62,621.59) 244.62,604.33 ; R17.2@232.42,609.39 ccw(c244.62,621.59) 244.62,604.33 ; 670.56,604.33 cw(c670.56,587.89) v1@682.19,599.51 ; 670.56,604.33 ccw(c670.56,620.77) v1@682.19,609.15 ; 670.56,604.33 ccw(c670.56,620.77) v1@682.19,609.15 ; 670.56,604.33 cw(c670.56,587.89) v1@682.19,599.51 ; 670.56,604.33 ccw(c670.56,620.77) v1@682.19,609.15 ; 670.56,604.33 cw(c670.56,587.89) v1@682.19,599.51
  Bottom Layer w10: v1(687.01,604.33) 712.6,629.92 712.6,1478.35 695.87,1495.08 v1(696.85,1495.08) ; v1@687.01,611.14 ccw(c687.01,627.59) 698.63,615.96 ; v1@687.01,611.14 ccw(c687.01,627.59) 698.63,615.96 ; v1@687.01,611.14 ccw(c687.01,627.59) 698.63,615.96 ; v1@693.82,604.33 cw(c710.26,604.33) 698.64,615.96 ; v1@693.82,604.33 cw(c710.26,604.33) 698.64,615.96 ; v1@693.82,604.33 cw(c710.26,604.33) 698.64,615.96 ; v1@696.85,1488.27 cw(c696.85,1474.2) 706.8,1484.15 ; v1@696.85,1488.27 cw(c696.85,1474.2) 706.8,1484.15 ; v1@696.85,1488.27 cw(c696.85,1474.2) 706.8,1484.15 ; v1@703.66,1495.08 ccw(c722.48,1495.08) 709.17,1481.77 ; v1@703.66,1495.08 ccw(c722.48,1495.08) 709.17,1481.77 ; v1@703.66,1495.08 ccw(c722.48,1495.08) 709.17,1481.77
MCO: C9.1 P3.2 R12.2 | length 2761.8
  Top Layer w7: C9.1@688.98,1757.87 C9.1@688.98,1755.91 688.98,1641.04 708.66,1621.35 v1(709,1621.7) ; 697.31,1633.38 ccw(c711.28,1637.37) v1@709.19,1622.99 ; v1(792.32,1615.16) 822.44,1585.04 P3.2@1232.28,1585.04 ; C9.1@677.53,1744.46 cw(c649.9,1716.83) 688.98,1716.83 ; C9.1@677.53,1744.46 cw(c649.9,1716.83) 688.98,1716.83 ; C9.1@677.53,1744.46 cw(c649.9,1716.83) 688.98,1716.83 ; C9.1@682.48,1749.41 cw(c666.8,1733.73) 688.98,1733.73 ; C9.1@682.48,1749.41 cw(c666.8,1733.73) 688.98,1733.73 ; C9.1@682.48,1749.41 cw(c666.8,1733.73) 688.98,1733.73 ; 688.98,1716.83 cw(c728.05,1716.83) C9.1@700.42,1744.46 ; 688.98,1716.83 cw(c728.05,1716.83) C9.1@700.42,1744.46 ; 688.98,1716.83 cw(c728.05,1716.83) C9.1@700.42,1744.46 ; 688.98,1733.73 cw(c711.15,1733.73) C9.1@695.47,1749.41 ; 688.98,1733.73 cw(c711.15,1733.73) C9.1@695.47,1749.41 ; 688.98,1733.73 cw(c711.15,1733.73) C9.1@695.47,1749.41 ; 693.36,1636.6 cw(c680.92,1621.22) v1@700.69,1621.56 ; 693.36,1636.6 cw(c680.92,1621.22) v1@700.69,1621.56 ; 693.36,1636.6 cw(c680.92,1621.22) v1@700.69,1621.56 ; 693.65,1636.37 ccw(c709,1651.72) v1@709,1630.01 ; 693.65,1636.37 ccw(c709,1651.72) v1@709,1630.01 ; 693.65,1636.37 ccw(c709,1651.72) v1@709,1630.01 ; 695.3,1634.71 cw(c682.28,1621.7) v1@700.69,1621.7 ; 695.3,1634.71 cw(c682.28,1621.7) v1@700.69,1621.7 ; 695.3,1634.71 cw(c682.28,1621.7) v1@700.69,1621.7 ; 696.52,1633.7 cw(c691.97,1618.29) v1@707.72,1621.44 ; 696.52,1633.7 cw(c691.97,1618.29) v1@707.72,1621.44 ; 696.52,1633.7 cw(c691.97,1618.29) v1@707.72,1621.44 ; 696.9,1633.73 cw(c689.95,1625.14) v1@700.83,1623.18 ; 696.9,1633.73 cw(c689.95,1625.14) v1@700.83,1623.18 ; 696.9,1633.73 cw(c689.95,1625.14) v1@700.83,1623.18 ; 697.46,1633.74 ccw(c711.77,1637.58) v1@709.23,1622.99 ; 697.46,1633.74 ccw(c711.77,1637.58) v1@709.23,1622.99 ; 697.46,1633.74 ccw(c711.77,1637.58) v1@709.23,1622.99 ; 697.78,1633.02 ccw(c706.65,1643.98) v1@708.13,1629.96 ; 697.78,1633.02 ccw(c706.65,1643.98) v1@708.13,1629.96 ; 697.78,1633.02 ccw(c706.65,1643.98) v1@708.13,1629.96 ; 697.78,1633.02 ccw(c706.65,1643.98) v1@708.13,1629.96 ; 697.78,1633.02 ccw(c706.65,1643.98) v1@708.13,1629.96 ; 697.78,1633.02 ccw(c706.65,1643.98) v1@708.13,1629.96 ; v1@792.06,1613.87 cw(c788.93,1598.6) 803.99,1602.64 ; v1@792.06,1613.87 cw(c788.93,1598.6) 803.99,1602.64 ; v1@792.06,1613.87 cw(c788.93,1598.6) 803.99,1602.64 ; v1@792.32,1606.85 cw(c792.32,1586.78) 806.51,1600.97 ; v1@792.32,1606.85 cw(c792.32,1586.78) 806.51,1600.97 ; v1@792.32,1606.85 cw(c792.32,1586.78) 806.51,1600.97 ; v1@793.61,1615.42 ccw(c808.88,1618.55) 804.84,1603.49 ; v1@793.61,1615.42 ccw(c808.88,1618.55) 804.84,1603.49 ; v1@793.61,1615.42 ccw(c808.88,1618.55) 804.84,1603.49 ; v1@800.63,1615.16 ccw(c820.7,1615.16) 806.51,1600.97 ; v1@800.63,1615.16 ccw(c820.7,1615.16) 806.51,1600.97 ; v1@800.63,1615.16 ccw(c820.7,1615.16) 806.51,1600.97 ; 1169.45,1585.04 cw(c1169.45,1522.2) P3.2@1213.88,1566.64 ; 1169.45,1585.04 ccw(c1169.45,1647.88) P3.2@1213.88,1603.44 ; 1169.45,1585.04 ccw(c1169.45,1647.88) P3.2@1213.88,1603.44 ; 1169.45,1585.04 cw(c1169.45,1522.2) P3.2@1213.88,1566.64 ; 1169.45,1585.04 ccw(c1169.45,1647.88) P3.2@1213.88,1603.44 ; 1169.45,1585.04 cw(c1169.45,1522.2) P3.2@1213.88,1566.64 ; 1186.35,1585.04 cw(c1186.35,1539.1) P3.2@1218.83,1571.58 ; 1186.35,1585.04 ccw(c1186.35,1630.98) P3.2@1218.83,1598.49 ; 1186.35,1585.04 ccw(c1186.35,1630.98) P3.2@1218.83,1598.49 ; 1186.35,1585.04 cw(c1186.35,1539.1) P3.2@1218.83,1571.58 ; 1186.35,1585.04 ccw(c1186.35,1630.98) P3.2@1218.83,1598.49 ; 1186.35,1585.04 cw(c1186.35,1539.1) P3.2@1218.83,1571.58
  Top Layer w10: R12.2@625.98,1820.87 C9.1@688.98,1757.87 ; R12.2@627.95,1808.15 cw(c627.95,1782.2) 646.3,1800.55 ; R12.2@627.95,1808.15 cw(c627.95,1782.2) 646.3,1800.55 ; R12.2@627.95,1808.15 cw(c627.95,1782.2) 646.3,1800.55 ; R12.2@640.67,1820.87 ccw(c676.12,1820.87) 651.05,1795.8 ; R12.2@640.67,1820.87 ccw(c676.12,1820.87) 651.05,1795.8 ; R12.2@640.67,1820.87 ccw(c676.12,1820.87) 651.05,1795.8 ; 662.52,1784.33 cw(c634.09,1755.91) C9.1@674.29,1755.91 ; 662.52,1784.33 cw(c634.09,1755.91) C9.1@674.29,1755.91 ; 662.52,1784.33 cw(c634.09,1755.91) C9.1@674.29,1755.91 ; 667.27,1779.58 ccw(c688.98,1801.29) C9.1@688.98,1770.59 ; 667.27,1779.58 ccw(c688.98,1801.29) C9.1@688.98,1770.59 ; 667.27,1779.58 ccw(c688.98,1801.29) C9.1@688.98,1770.59 ; C9.1@671.36,1766.83 ccw(c693.21,1772.68) C9.1@687.68,1750.75 ; C9.1@671.36,1766.83 ccw(c693.21,1772.68) C9.1@687.68,1750.75 ; C9.1@671.36,1766.83 ccw(c693.21,1772.68) C9.1@687.68,1750.75
  Bottom Layer w7: v1(709,1621.7) 714.56,1616.14 v1@792.32,1616.14 ; v1@709.93,1622.62 ccw(c725.58,1638.27) 725.58,1616.14 ; v1@709.93,1622.62 ccw(c725.58,1638.27) 725.58,1616.14 ; v1@709.93,1622.62 ccw(c725.58,1638.27) 725.58,1616.14 ; v1@714.88,1627.57 ccw(c742.48,1655.17) 742.48,1616.14 ; v1@714.88,1627.57 ccw(c742.48,1655.17) 742.48,1616.14 ; v1@714.88,1627.57 ccw(c742.48,1655.17) 742.48,1616.14 ; 769.88,1616.14 cw(c769.88,1592.72) v1@786.45,1609.28 ; 769.88,1616.14 cw(c769.88,1592.72) v1@786.45,1609.28 ; 769.88,1616.14 cw(c769.88,1592.72) v1@786.45,1609.28 ; 774.63,1616.14 ccw(c774.63,1632.85) v1@786.45,1621.03 ; 774.63,1616.14 ccw(c774.63,1632.85) v1@786.45,1621.03 ; 774.63,1616.14 ccw(c774.63,1632.85) v1@786.45,1621.03
NetC1_1: C1.1 C5.2 D1.1 D2.1 D6.1 U1.3 | length 4003.6
  Top Layer w31.5: U1.3@1856.3,615.16 1666.34,615.16 ; D2.1@2686.52,472.93 2648.62,510.83 ; v1@1643.76,596.14 cw(c1666.34,592.24) 1666.34,615.16 ; v1@1643.76,596.14 cw(c1666.34,592.24) 1666.34,615.16 ; v1@1643.76,596.14 cw(c1666.34,592.24) 1666.34,615.16 ; v1@1644.85,598.26 cw(c1685.66,557.45) 1685.66,615.16 ; v1@1644.85,598.26 cw(c1685.66,557.45) 1685.66,615.16 ; v1@1644.85,598.26 cw(c1685.66,557.45) 1685.66,615.16 ; v1@1644.84,626.78 ccw(c1666.34,640.86) 1666.34,615.16 ; v1@1644.84,626.78 ccw(c1666.34,640.86) 1666.34,615.16 ; v1@1644.84,626.78 ccw(c1666.34,640.86) 1666.34,615.16 ; v1@1645.35,626.15 ccw(c1671.89,652.7) 1671.89,615.16 ; v1@1645.35,626.15 ccw(c1671.89,652.7) 1671.89,615.16 ; v1@1645.35,626.15 ccw(c1671.89,652.7) 1671.89,615.16 ; v1@1648.74,591.69 ccw(c1641.9,615.16) 1666.34,615.16 ; v1@1648.74,591.69 ccw(c1641.9,615.16) 1666.34,615.16 ; v1@1648.74,591.69 ccw(c1641.9,615.16) 1666.34,615.16 ; v1@1649.85,632.48 cw(c1637,606.1) 1666.34,606.1 ; v1@1649.85,632.48 cw(c1637,606.1) 1666.34,606.1 ; v1@1649.85,632.48 cw(c1637,606.1) 1666.34,606.1 ; v1@1650.42,598.26 cw(c1611.99,559.83) 1666.34,559.83 ; v1@1650.42,598.26 cw(c1611.99,559.83) 1666.34,559.83 ; v1@1650.42,598.26 cw(c1611.99,559.83) 1666.34,559.83 ; v1@1650.91,631.72 cw(c1613.68,594.48) 1666.34,594.48 ; v1@1650.91,631.72 cw(c1613.68,594.48) 1666.34,594.48 ; v1@1650.91,631.72 cw(c1613.68,594.48) 1666.34,594.48 ; D1.1@1657.87,526.19 ccw(c1637.42,546.64) 1666.34,546.64 ; D1.1@1657.87,526.19 ccw(c1637.42,546.64) 1666.34,546.64 ; D1.1@1657.87,526.19 ccw(c1637.42,546.64) 1666.34,546.64 ; 1666.34,556.14 ccw(c1708.7,556.14) D1.1@1678.75,526.19 ; 1666.34,556.14 ccw(c1708.7,556.14) D1.1@1678.75,526.19 ; 1666.34,556.14 ccw(c1708.7,556.14) D1.1@1678.75,526.19 ; 1666.34,561.22 cw(c1717.32,561.22) v1@1681.27,597.27 ; 1666.34,561.22 cw(c1717.32,561.22) v1@1681.27,597.27 ; 1666.34,561.22 cw(c1717.32,561.22) v1@1681.27,597.27 ; 1666.34,595.67 cw(c1717.32,595.67) v1@1681.27,631.72 ; 1666.34,595.67 cw(c1717.32,595.67) v1@1681.27,631.72 ; 1666.34,595.67 cw(c1717.32,595.67) v1@1681.27,631.72 ; 1666.34,606.49 cw(c1695.44,606.49) v1@1682.27,632.45 ; 1666.34,606.49 cw(c1695.44,606.49) v1@1682.27,632.45 ; 1666.34,606.49 cw(c1695.44,606.49) v1@1682.27,632.45 ; 1666.34,615.16 cw(c1666.34,593.48) v1@1687.99,594.71 ; 1666.34,615.16 ccw(c1692.67,615.16) v1@1682.54,590.85 ; 1666.34,615.16 ccw(c1666.34,639.96) v1@1687.4,626.86 ; 1666.34,615.16 ccw(c1692.67,615.16) v1@1682.54,590.85 ; 1666.34,615.16 cw(c1666.34,593.48) v1@1687.99,594.71 ; 1666.34,615.16 ccw(c1666.34,639.96) v1@1687.4,626.86 ; 1666.34,615.16 ccw(c1692.67,615.16) v1@1682.54,590.85 ; 1666.34,615.16 cw(c1666.34,593.48) v1@1687.99,594.71 ; 1666.34,615.16 ccw(c1666.34,639.96) v1@1687.4,626.86 ; 1666.34,615.16 1666.34,512.8 2035.43,512.8 C1.1@2035.43,410.43 2037.4,408.46 C5.2@2159.45,408.46 2159.45,510.83 2648.62,510.83 ; D1.1@1678.75,526.19 ccw(c1711.08,558.52) 1711.08,512.8 ; D1.1@1678.75,526.19 ccw(c1711.08,558.52) 1711.08,512.8 ; D1.1@1678.75,526.19 ccw(c1711.08,558.52) 1711.08,512.8 ; v1@1681.27,597.27 cw(c1724.45,554.09) 1724.45,615.16 ; v1@1681.27,597.27 cw(c1724.45,554.09) 1724.45,615.16 ; v1@1681.27,597.27 cw(c1724.45,554.09) 1724.45,615.16 ; v1@1681.27,626.15 ccw(c1707.82,652.7) 1707.82,615.16 ; v1@1681.27,626.15 ccw(c1707.82,652.7) 1707.82,615.16 ; v1@1681.27,626.15 ccw(c1707.82,652.7) 1707.82,615.16 ; 2593.76,510.83 cw(c2593.76,397.89) D2.1@2673.62,477.75 ; 2593.76,510.83 cw(c2593.76,397.89) D2.1@2673.62,477.75 ; 2593.76,510.83 cw(c2593.76,397.89) D2.1@2673.62,477.75 ; 2630.12,502.86 ccw(c2655.15,546.22) D2.1@2677.47,501.4 ; 2630.12,502.86 ccw(c2655.15,546.22) D2.1@2677.47,501.4 ; 2630.12,502.86 ccw(c2655.15,546.22) D2.1@2677.47,501.4 ; 2648.62,510.83 ccw(c2671.64,533.84) D2.1@2680.18,502.43 ; 2648.62,510.83 ccw(c2671.64,533.84) D2.1@2680.18,502.43 ; 2648.62,510.83 ccw(c2671.64,533.84) D2.1@2680.18,502.43
  other v1: 1174.21,371.06 1206.69,371.06 1239.17,371.06 1684.06,594.49 1611.22,595.47 1647.64,595.47 1612.2,628.94 1648.13,628.94 1684.06,628.94
NetC4_2: C4.2 P2.1 U2.5 | length 1506.7
  Top Layer w15: U2.5@2468.5,412.8 2534.45,412.8 C4.2@2536.42,410.83 2571.46,410.83 2589.57,392.72 2589.57,320.87 2641.73,268.7 2776.94,268.7 2812.99,232.65 2812.99,166.34 2837.6,141.73 2887.8,141.73 2911.42,165.35 2911.42,205.71 2953.74,248.03 3104.33,248.03 P2.1@3162.4,189.96 ; 2502.25,412.8 cw(c2502.25,376.66) C4.2@2527.8,402.21 ; 2502.25,412.8 cw(c2502.25,376.66) C4.2@2527.8,402.21 ; 2502.25,412.8 cw(c2502.25,376.66) C4.2@2527.8,402.21 ; 2511.75,412.8 ccw(c2511.75,435.49) C4.2@2527.8,419.44 ; 2511.75,412.8 ccw(c2511.75,435.49) C4.2@2527.8,419.44 ; 2511.75,412.8 ccw(c2511.75,435.49) C4.2@2527.8,419.44 ; C4.2@2545.03,402.21 cw(c2565.83,381.41) 2565.83,410.83 ; C4.2@2545.03,402.21 cw(c2565.83,381.41) 2565.83,410.83 ; C4.2@2545.03,402.21 cw(c2565.83,381.41) 2565.83,410.83 ; C4.2@2545.03,419.44 ccw(c2565.83,440.24) 2565.83,410.83 ; C4.2@2545.03,419.44 ccw(c2565.83,440.24) 2565.83,410.83 ; C4.2@2545.03,419.44 ccw(c2565.83,440.24) 2565.83,410.83 ; 3124.8,227.56 cw(c3087.19,189.96) P2.1@3140.37,189.96 ; 3124.8,227.56 ccw(c3162.4,265.17) P2.1@3162.4,211.99 ; 3124.8,227.56 ccw(c3162.4,265.17) P2.1@3162.4,211.99 ; 3124.8,227.56 cw(c3087.19,189.96) P2.1@3140.37,189.96 ; 3124.8,227.56 ccw(c3162.4,265.17) P2.1@3162.4,211.99 ; 3124.8,227.56 cw(c3087.19,189.96) P2.1@3140.37,189.96